# Altium PCB RWR.PcbDoc
Units mm, origin at the board's own origin, x right, y up, seen from the top; angles counter-clockwise.
Board outline 29 x 30 mm, 2 copper layers (Top Layer, Bottom Layer); 9 components, 45 nets, 19 pads, 0 vias.
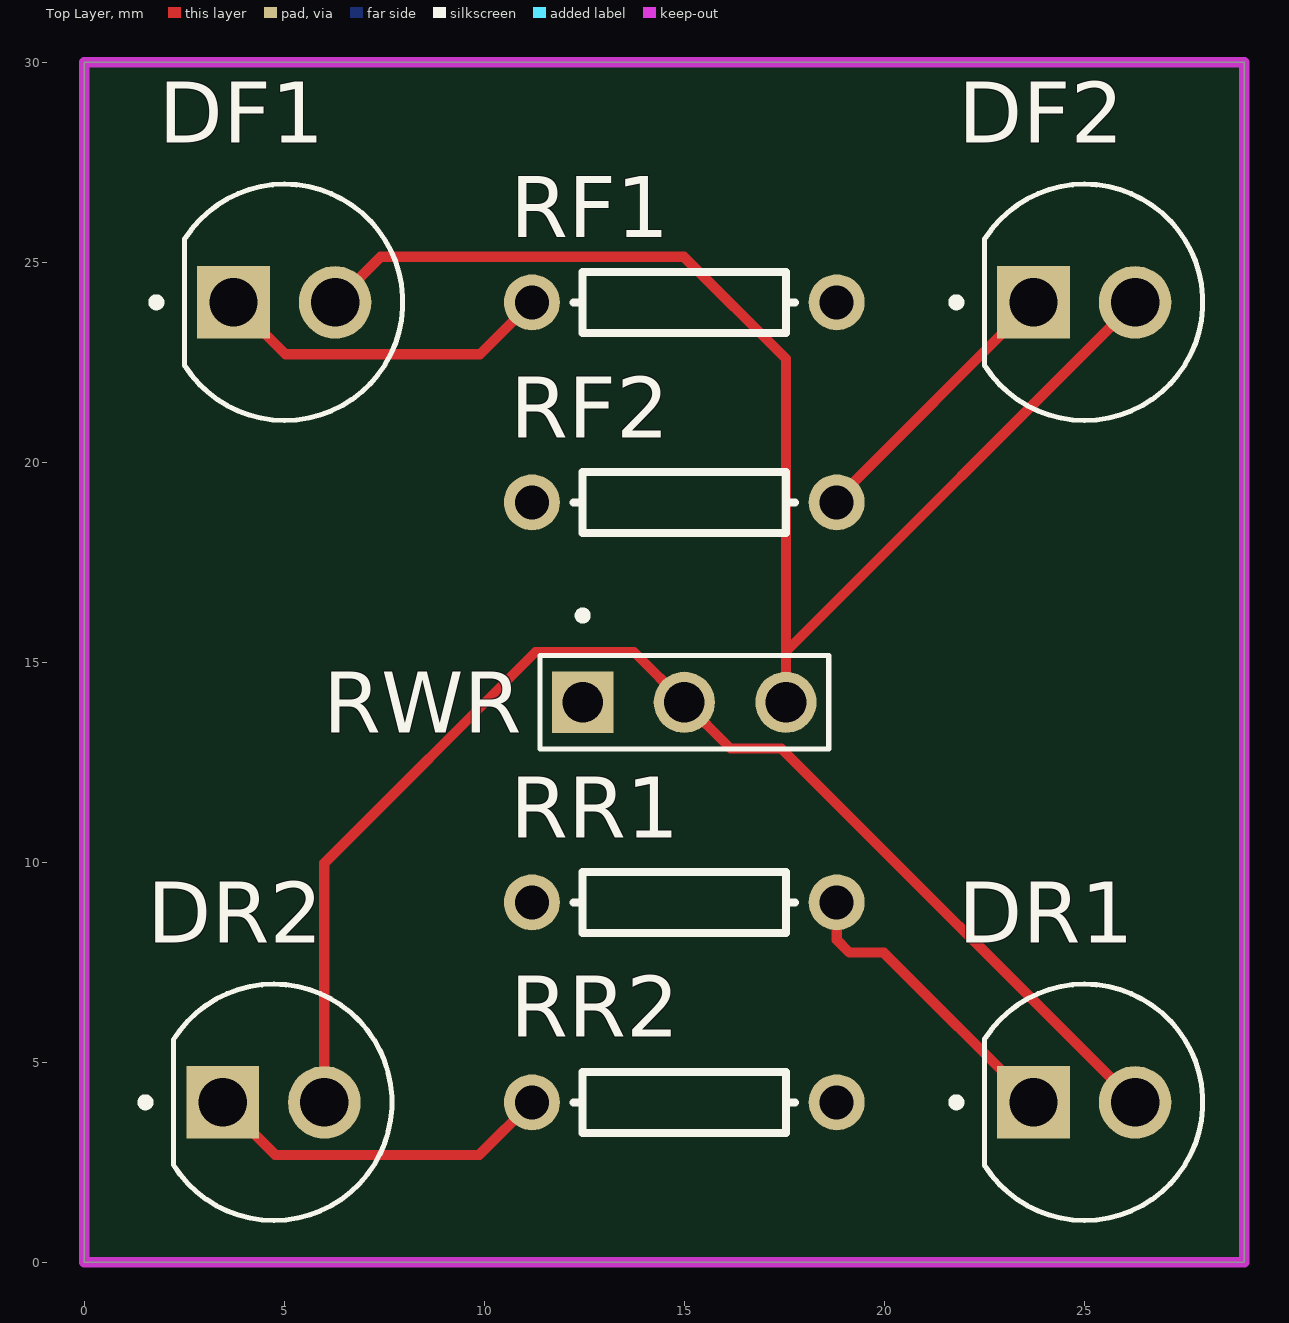
[diagram p0: Top Layer view]
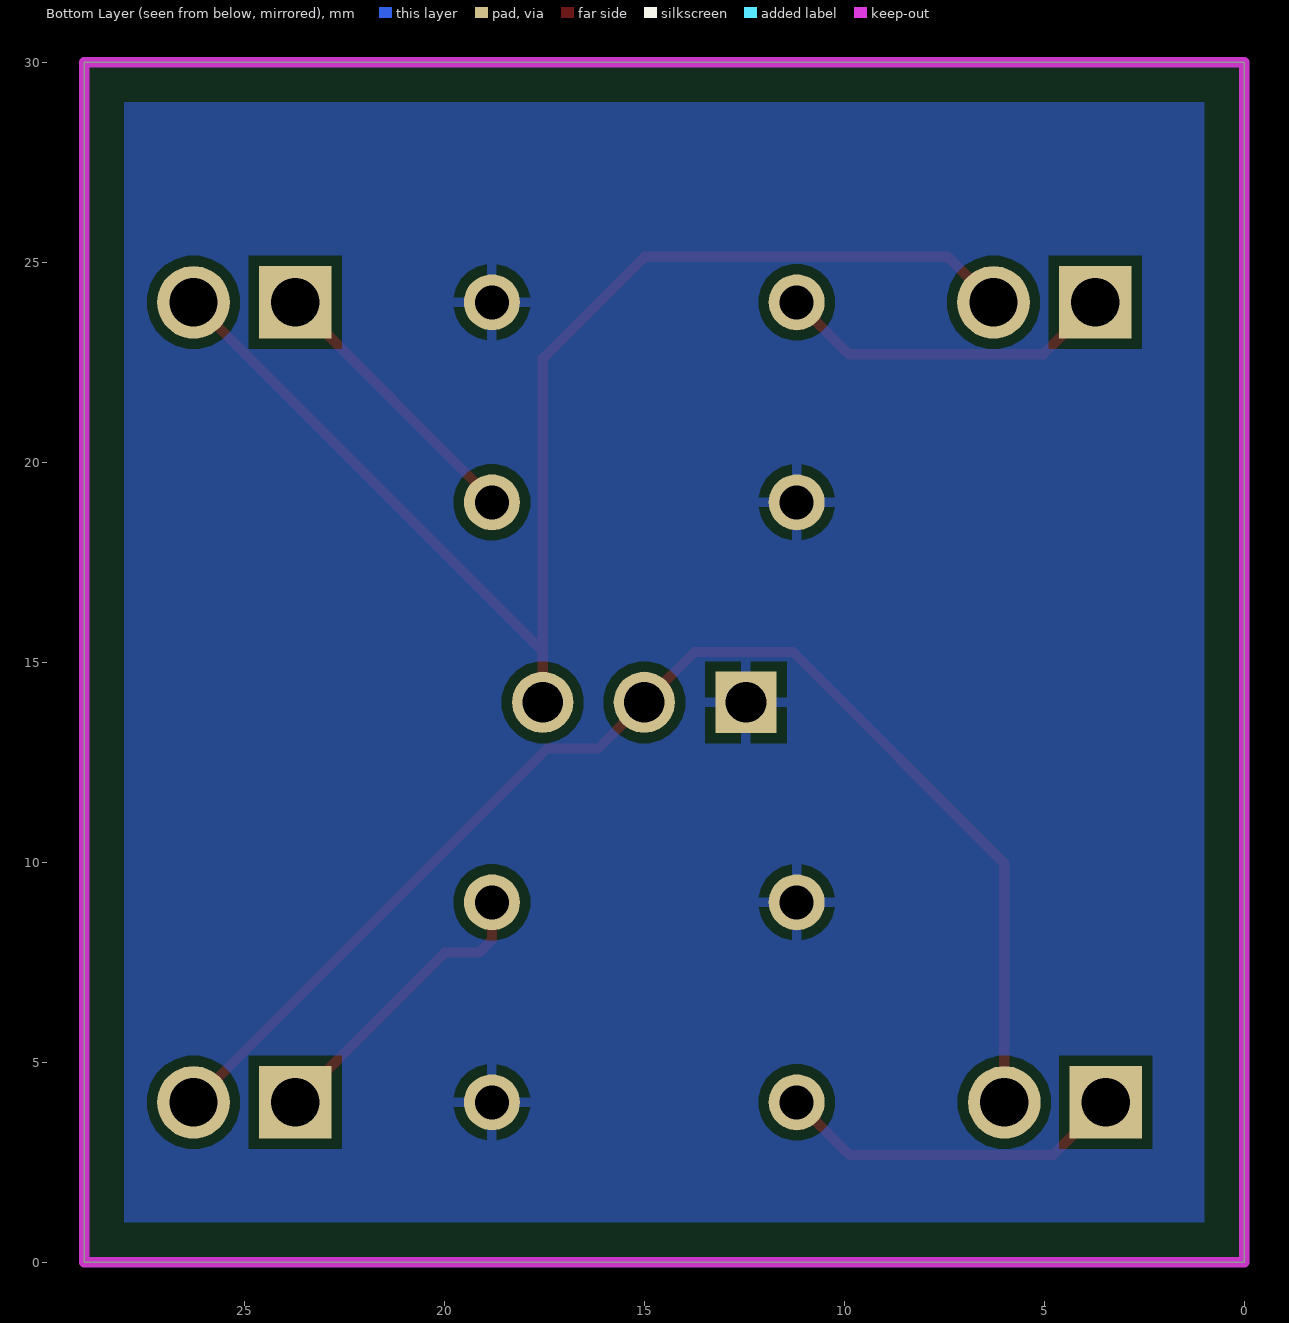
[diagram p1: Bottom Layer view, seen from below]

## Layer stack, top to bottom
Top Solder: solder mask 0.0102, Solder Resist, Dk 3.5
Top Layer: signal copper 0.0356
Dielectric 1: dielectric 0.32, FR-4, Dk 4.8
Bottom Layer: signal copper 0.0356
Bottom Solder: solder mask 0.0102, Solder Resist, Dk 3.5

## Board outline
0,0 29,0 29,30 0,30

## Design rules (kind name [scope] priority, off if disabled: settings)
Clearance [All] p1: gap=0.254 ignorepadtopadclearanceinfootprint=FALSE except(0: Arc-Hole Track-Hole SMDPad-Hole THPad-Hole Via-Hole Fill-Hole Poly-Hole Region-Hole Text-Hole)
PolygonConnect [All] p1: connectstyle=Relief reliefconductorwidth=0.254 reliefentries=4 polygonreliefangle="90 Angle" airgapwidth=0.254
RoomDefinition RWR [InComponentClass('RWR')] p1: confinementstyle=ConfineIn formatcopy=TRUE lockcomponents=TRUE outline 0,0 29,0 29,30 0,30
RoutingVias [All] p1: holewidth=0.711 width=1.27 viastyle="Through Hole" minholewidth=0.711 minwidth=1.27 maxholewidth=0.711 maxwidth=1.27
SolderMaskExpansion [All] p1: expansion=0.102 istentingtop=FALSE
Width "Schematic Width Constraint_5" [InNet('OUTB')] p1: maxlimit=0.508 minlimit=0.254 preferedwidth=0.508 minimp=50.000000 maximp=50.000000 favimp=50.000000
Width "Schematic Width Constraint_4" [InNet('OUTA')] p2: maxlimit=0.508 minlimit=0.254 preferedwidth=0.508 minimp=50.000000 maximp=50.000000 favimp=50.000000
Width "Schematic Width Constraint_3" [InNet('+12')] p3: maxlimit=0.381 minlimit=0.381 preferedwidth=0.381 minimp=50.000000 maximp=50.000000 favimp=50.000000
Width "Schematic Width Constraint_2" [InNet('+5')] p4: maxlimit=0.381 minlimit=0.381 preferedwidth=0.381 minimp=50.000000 maximp=50.000000 favimp=50.000000
Width "Schematic Width Constraint_1" [InNet('NetR1_1')] p5: maxlimit=0.508 minlimit=0.254 preferedwidth=0.254 minimp=50.000000 maximp=50.000000 favimp=50.000000
Width "Schematic Width Constraint" [InNet('NetR2_1')] p6: maxlimit=0.508 minlimit=0.254 preferedwidth=0.254 minimp=50.000000 maximp=50.000000 favimp=50.000000
Width [All] p7: maxlimit=0.254 minlimit=0.254 preferedwidth=0.254
30 further rules are at their usual default settings.

## Classes and differential pairs
component class "Joystick Board": BUTTONS CMS JOY1 JOYSTICK LAUNCH PDOWN PUP

## Components (designator, comment, footprint, x,y, rotation, side; value= is the part's Value field where it differs from the comment)
DF1 "L08R5000Q1" LEDRD254W57D500H1070 5,24 r0 top
DF2 "L08R5000Q1" LEDRD254W57D500H1070 25,24 r0 top
DR1 "L08R5000Q1" LEDRD254W57D500H1070 25,4 r0 top
DR2 "L08R5000Q1" LEDRD254W57D500H1070 4.73,4 r0 top
RF1 "Res1" AXIAL-0.3 15,24 r0 top value=1K
RF2 "Res1" AXIAL-0.3 15,19 r180 top value=1K
RR1 "Res1" AXIAL-0.3 15,9 r180 top value=1K
RR2 "Res1" AXIAL-0.3 15,4 r0 top value=1K
RWR "5-146281-3" TE_5-146281-3 15,14 r0 top

## Footprints (in the part's own frame and the unit in brackets; to place one, negate y for a bottom-side part, rotate by r counter-clockwise, add the part's x,y. Pads: shape width x height; smd on the part's side, far side on the other; paste and mask are expansions set on the pad)
AXIAL-0.3 [mm] "Axial Device, Thru-Hole; 2 Leads; 0.3 in Pin Spacing"
  round 1.4 hole 0.85: 1(-3.81,0) 2(3.81,0)
  silkscreen extent -2.77,-0.76 2.77,0.76
LEDRD254W57D500H1070 [mm]
  round 1.815 hole 1.21: A(1.27,0)
  rect 1.815x1.815 hole 1.21: C(-1.27,0)
  silkscreen extent -3.3,-2.96 2.96,2.96
TE_5-146281-3 [mm]
  rect 1.53x1.53 hole 1.02: 1(-2.54,0)
  round 1.53 hole 1.02: 2(0,0) 3(2.54,0)
  silkscreen extent -3.61,-1.17 3.61,2.27

## Part data
DF1 DF2 DR1 DR2: "LED, Orange, Through Hole, T-1 3/4 (5mm), 30 mA, 2.1 V, 635 nm", Package=None, Availability=Unavailable, MP=L08R5000Q1, Price=None
RF1 RF2 RR1 RR2: "Resistor", LatestRevisionDate=17-Jul-2002, LatestRevisionNote="Re-released for DXP Platform.", PackageDescription="Axial Device, Thru-Hole; 2 Leads; 0.3 in Pin Spacing", PackageReference=AXIAL-0.3, Published=8-Jun-2000, Publisher="Altium Limited"
RWR: "Header; Conn; Interconnect System; PCB Plug; 3 Cont; Thru-Hole; Breakaway; Straight; 3A", Package=None, Availability=Unavailable, Centerline_Pitch="2.54 mm[.1 in]", EU_RoHS_Compliance=Compliant, MF="TE Connectivity", MP=5-146281-3, Number_of_Positions=3, Price=None, Product_Type=Connector, SnapEDA_Link=https://www.snapeda.com/parts/5-146281-3/TE%20Connectivity%20AMP%20Connectors/view-part/460785/?ref=snap, TE_purchase_URL=https://www.te.com/usa-en/product-5-146281-3.html?te_bu=Cor&te_type=disp&te_campaign=seda_glo_cor-seda-global-disp-prtnr-fy19-seda-model-bom-cta_sma-317_1&elqCampaignId=32493

## Nets (pads, with @x,y where several pads share a name; then routed paths per layer and width w, separated by ;. In a path a pad name is that pad's centre, name@x,y a point inside that pad or via, vN(x,y) a via of type N, cw(c..) or ccw(c..) an arc to the next point about the centre after c; other vN are vias at no path point)
+5: 
+12: 
AGND: 
BEEPER: 
CMS: 
DB0: 
DB1: 
DB2: 
DB3: 
DB4: 
DB5: 
DB6: 
DB7: 
GND: RF1.2 RF2.2 RR1.2 RR2.2 RWR.1
Launch: 
nAB: 
NetC8_1: 
NetC9_1: 
NetDF1_C: DF1.C RF1.1 | length 8.5
  Top Layer w0.254: DF1.C 5.028,22.702 9.892,22.702 RF1.1
NetDF2_C: DF2.C RF2.1 | length 7
  Top Layer w0.254: RF2.1 18.81,19.08 DF2.C
NetDF3_C: DR1.C RR1.1 | length 7.5
  Top Layer w0.254: RR1.1 18.81,8.061 19.13,7.741 19.989,7.741 DR1.C
NetDF4_C: DR2.C RR2.1 | length 8.8
  Top Layer w0.254: DR2.C 4.773,2.687 9.877,2.687 RR2.1
NetJ5_1: 
NetJ5_2: 
NetJ5_3: 
NetJ5_4: 
NetJ6_1: 
NetJ6_2: 
NetLS_P: 
NetR1_1: 
NetR2_1: 
nLDAC: 
nRST: 
nWR: 
OUTA: 
OUTB: 
PDOWN: 
pLAUNCH: 
PUP: 
RWRF: DF1.A DF2.A RWR.3 | length 33.7
  Top Layer w0.254: DF1.A 7.41,25.14 14.99,25.14 17.54,22.59 17.54,15.27 ; RWR.3 17.54,15.27 ; DF2.A 17.54,15.27
RWRR: DR1.A DR2.A RWR.2 | length 33.1
  Top Layer w0.254: DR2.A 6,9.978 11.281,15.26 13.74,15.26 RWR.2 16.153,12.847 17.423,12.847 DR1.A
RXRWRF: 
STICKX: 
STICKY: 
TXRWRR: 

## Polygon pours and split planes (outlines as drawn)
GND on Bottom Layer "GND_L02_P000" (solid, pour order 0): 1,29 28,29 28,1 1,1

## Keep-outs
Keep-Out Layer:
  the board outline again, w0.254